# EAGLE board WSN_Gateway_feather_v3 (EAGLE 8.2.2)
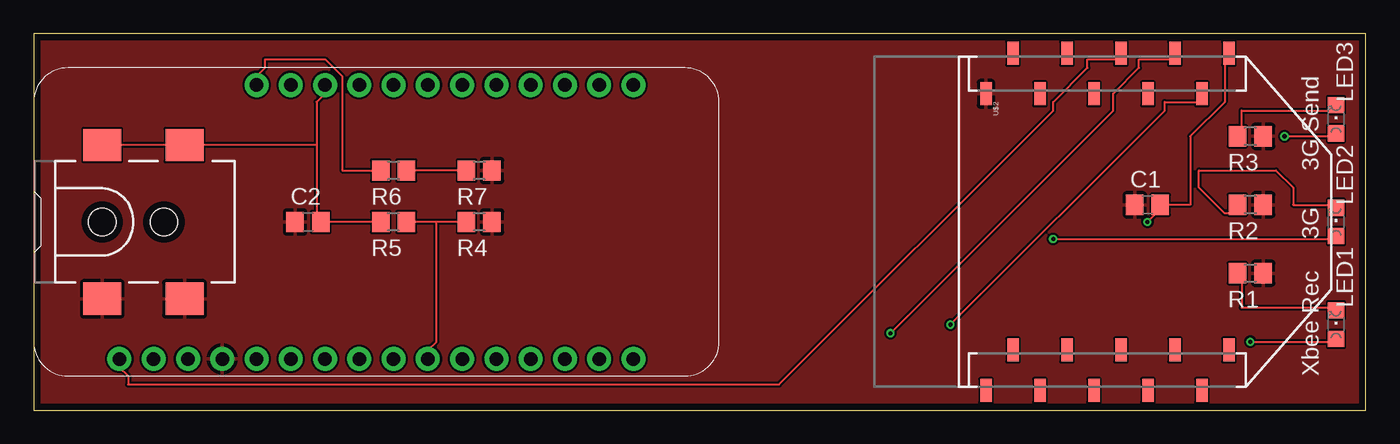
[diagram p0: board, top side]
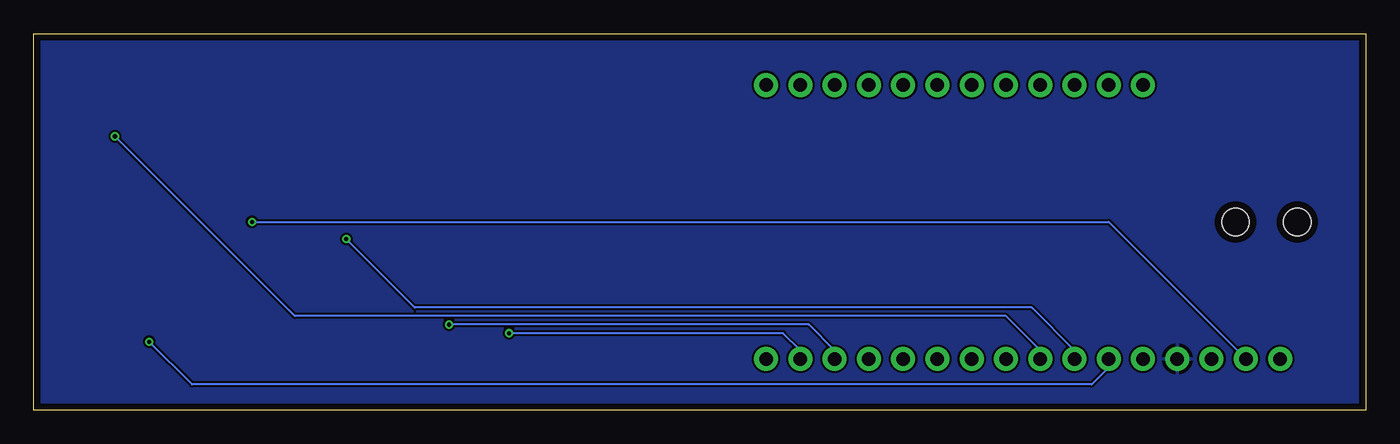
[diagram p1: board, bottom side, seen from below]

Size 98.73 x 27.93 mm. Coordinates in mm from the lower left corner, seen from the top.
Outline: 0,0 98.73,0 98.73,27.93 0,27.93 0,0
Copper layers (1*16): Top 0.035mm / dielectric 1.6mm / Bottom 0.035mm
Design rules "Elecrow_2-layer_PCB_eagle_rule": minimum track width 6mil, minimum drill 12mil, track to track 6mil, track to pad 6mil, pad to pad 6mil, via to via 8mil, smd to smd 0mil, copper to edge 20mil, drill to drill 10mil, minimum pad ring 6mil, minimum via ring 6mil, stop-mask expansion 0mil, vias tented up to drill 100mil, thermal gap 10mil

## Footprints (pad centres in the part's own frame; a part is rotated, then mirrored left to right if it is on the bottom)
C0805 = smd 1.3 x 1.5: 1 -0.95,0; 2 0.95,0
POWER_JACK_SMD = smd 2.8 x 2.4: GND 0,-5.7; P$4 6.1,-5.7; VIN0 0,5.7; VIN1 6.1,5.7 | hole 2.032: 0,0; 4.572,0
CHIPLED_0805 = smd 1.2 x 1.2: A 0,-1.05; C 0,1.05
FEATHERWING_DIM_2 = drill 1 pad 1.778: 1 6.35,1.27; 2 8.89,1.27; 3 11.43,1.27; 4 13.97,1.27; 5 16.51,1.27; 6 19.05,1.27; 7 21.59,1.27; 8 24.13,1.27; 9 26.67,1.27; 10 29.21,1.27; 11 31.75,1.27; 12 34.29,1.27; 13 36.83,1.27; 14 39.37,1.27; 15 41.91,1.27; 16 44.45,1.27; 17 44.45,21.59; 18 41.91,21.59; 19 39.37,21.59; 20 36.83,21.59; 21 34.29,21.59; 22 31.75,21.59; 23 29.21,21.59; 24 26.67,21.59; 25 24.13,21.59; 26 21.59,21.59; 27 19.05,21.59; 28 16.51,21.59
R0805 = smd 1.3 x 1.5: 1 -0.95,0; 2 0.95,0
XBEE-SMD = smd 1.7 x 0.85: 1 -12.5,20; 2 -9.5,18; 3 -12.5,16; 4 -9.5,14; 5 -12.5,12; 6 -9.5,10; 7 -12.5,8; 8 -9.5,6; 9 -12.5,4; 10 -9.5,2; 11 12.5,2; 12 9.5,4; 13 12.5,6; 14 9.5,8; 15 12.5,10; 16 9.5,12; 17 12.5,14; 18 9.5,16; 19 12.5,18; 20 9.5,20

## Placement (x,y rotation side)
C1  100n  [C0805]  82.55,15.24 0 top
C2  100n  [C0805]  20.32,13.97 0 top
J1  5.5x2.1mm Barrel  [POWER_JACK_SMD]  5.08,13.97 0 top
LED1  [CHIPLED_0805]  96.52,6.35 0 top
LED2  [CHIPLED_0805]  96.52,13.97 0 top
LED3  [CHIPLED_0805]  96.52,21.59 0 top
MS1  FEATHERWING_NODIM_NOHOLES  [FEATHERWING_DIM_2]  0,2.54 0 top
R1  330  [R0805]  90.17,10.16 180 top
R2  330  [R0805]  90.17,15.24 180 top
R3  330  [R0805]  90.17,20.32 180 top
R4  2M  [R0805]  33.02,13.97 180 top
R5  2M  [R0805]  26.67,13.97 180 top
R6  2M  [R0805]  26.67,17.78 180 top
R7  2M  [R0805]  33.02,17.78 180 top
U$2  XBEE-2B3  [XBEE-SMD]  68.58,13.97 270 top

## Library data of the parts
C1 C2 = wsn; SPICEMODEL: NONE; SPICEPREFIX: C
J1 = wsn; PROD_ID: CONN-08106; SF_ID: PRT-12748
LED1-LED3 MS1 = adafruit
R1-R7 = rcl
U$2 = SparkFun-RF; PROD_ID: CONN-09042

## Nets
3V: C1.2 MS1.2 U$2.1
CTS_XBEE: U$2.12
GND: C1.1 C2.1 J1.GND J1.P$4 MS1.4 R1.1 R2.1 R3.1 R4.1 R7.1 U$2.10
LED1: LED1.A MS1.6
LED2: LED2.A MS1.7
LED3: LED3.A MS1.8
N$1: LED1.C R1.2
N$2: LED2.C R2.2
N$3: LED3.C R3.2
N$4: MS1.25
N$5: MS1.24
N$6: MS1.23
N$7: MS1.22
N$8: MS1.21
N$9: MS1.20
N$10: MS1.19
N$11: MS1.18
N$12: MS1.17
N$13: MS1.16
N$14: MS1.13
N$15: MS1.12
N$16: MS1.11
N$17: MS1.5
N$18: MS1.3
N$20: MS1.27
RESET: MS1.1 U$2.5
USB: C2.2 J1.VIN0 J1.VIN1 MS1.26 R5.2
USB_MEASURE: MS1.10 R4.2 R5.1
VBAT: MS1.28 R6.2
VBAT_MEAS: MS1.9
VBAT_MEASURE: R6.1 R7.2
XBEE_RX: MS1.15 U$2.3
XBEE_TX: MS1.14 U$2.2

## Tracks (layer width: path | path; a pad name or v marks a point on that pad's centre or on a via)
3V  (via drill 0.3)
  Top 0.152: U$2.1 88.27,26.04 88.27,22.86 85.72,20.32 85.72,15.24 C1.2 83.19,15.24 83.19,14.61 v82.55,13.97
  Bottom 0.152: MS1.2 19.05,13.97 v82.55,13.97
GND
  pour Bottom: -2.54,30.48 101.6,30.48 101.6,-2.54 -2.54,-2.54
  pour Top: -1.27,29.21 100.33,29.21 100.33,-1.27 -1.27,-1.27
LED1  (via drill 0.3)
  Top 0.152: v90.17,5.08 96.52,5.08 LED1.A
  Bottom 0.152: v90.17,5.08 87,1.91 20.32,1.91 19.05,3.17 MS1.6
LED2  (via drill 0.3)
  Top 0.152: v75.56,12.7 96.52,12.7 LED2.A
  Bottom 0.152: v75.56,12.7 70.48,7.62 24.77,7.62 21.59,4.45 MS1.7
LED3  (via drill 0.3)
  Top 0.152: v92.71,20.32 96.52,20.32 LED3.A
  Bottom 0.152: v92.71,20.32 79.38,6.99 26.67,6.99 24.13,4.45 MS1.8
N$1
  Top 0.152: LED1.C 96.52,7.62 89.53,7.62 89.53,10.16 R1.2
N$2
  Top 0.152: LED2.C 96.52,15.24 93.34,15.24 93.34,16.51 92.08,17.78 86.36,17.78 86.36,16.51 88.27,14.61 88.9,14.61 88.9,15.24 R2.2
N$3
  Top 0.152: LED3.C 96.52,22.23 89.53,22.23 89.53,20.32 R3.2
RESET
  Top 0.152: MS1.1 6.35,3.17 6.99,2.54 6.99,1.91 55.24,1.91 75.56,22.23 75.56,22.86 78.11,25.4 78.11,26.04 80.64,26.04 U$2.5
USB
  Top 0.152: J1.VIN0 5.08,19.68 10.79,19.68 J1.VIN1 11.43,19.68 20.95,19.68 | R5.2 C2.2 20.95,13.97 20.95,19.68 | 20.95,19.68 20.95,22.86 21.59,23.5 MS1.26
USB_MEASURE
  Top 0.152: R4.2 29.84,13.97 | 29.84,13.97 R5.1 | 29.84,13.97 29.84,5.08 29.21,4.45 MS1.10
VBAT
  Top 0.152: R6.2 22.86,17.78 22.86,24.77 21.59,26.04 17.14,26.04 17.14,25.4 16.51,24.77 MS1.28
VBAT_MEASURE
  Top 0.152: R7.2 R6.1
XBEE_RX  (via drill 0.3)
  Top 0.152: v63.5,5.71 80.01,22.23 80.01,23.5 81.92,25.4 81.92,26.04 84.45,26.04 U$2.3
  Bottom 0.152: v63.5,5.71 43.18,5.71 41.91,4.45 MS1.15
XBEE_TX  (via drill 0.3)
  Top 0.152: v67.94,6.35 83.82,22.23 83.82,22.86 86.36,22.86 U$2.2
  Bottom 0.152: v67.94,6.35 41.27,6.35 39.37,4.45 MS1.14

## Text on the board
tPlace: 3G Send | 3G | Xbee Rec